# Altium PCB Board_V1_9.PcbDoc
Units mil, origin at the board's own origin, x right, y up, seen from the top; angles counter-clockwise.
Board outline 4000 x 2500 mil, 2 copper layers (Top Layer, Bottom Layer); 21 components, 20 nets, 97 pads, 6 vias.
Unrouted connection lines stored in the file: 13.
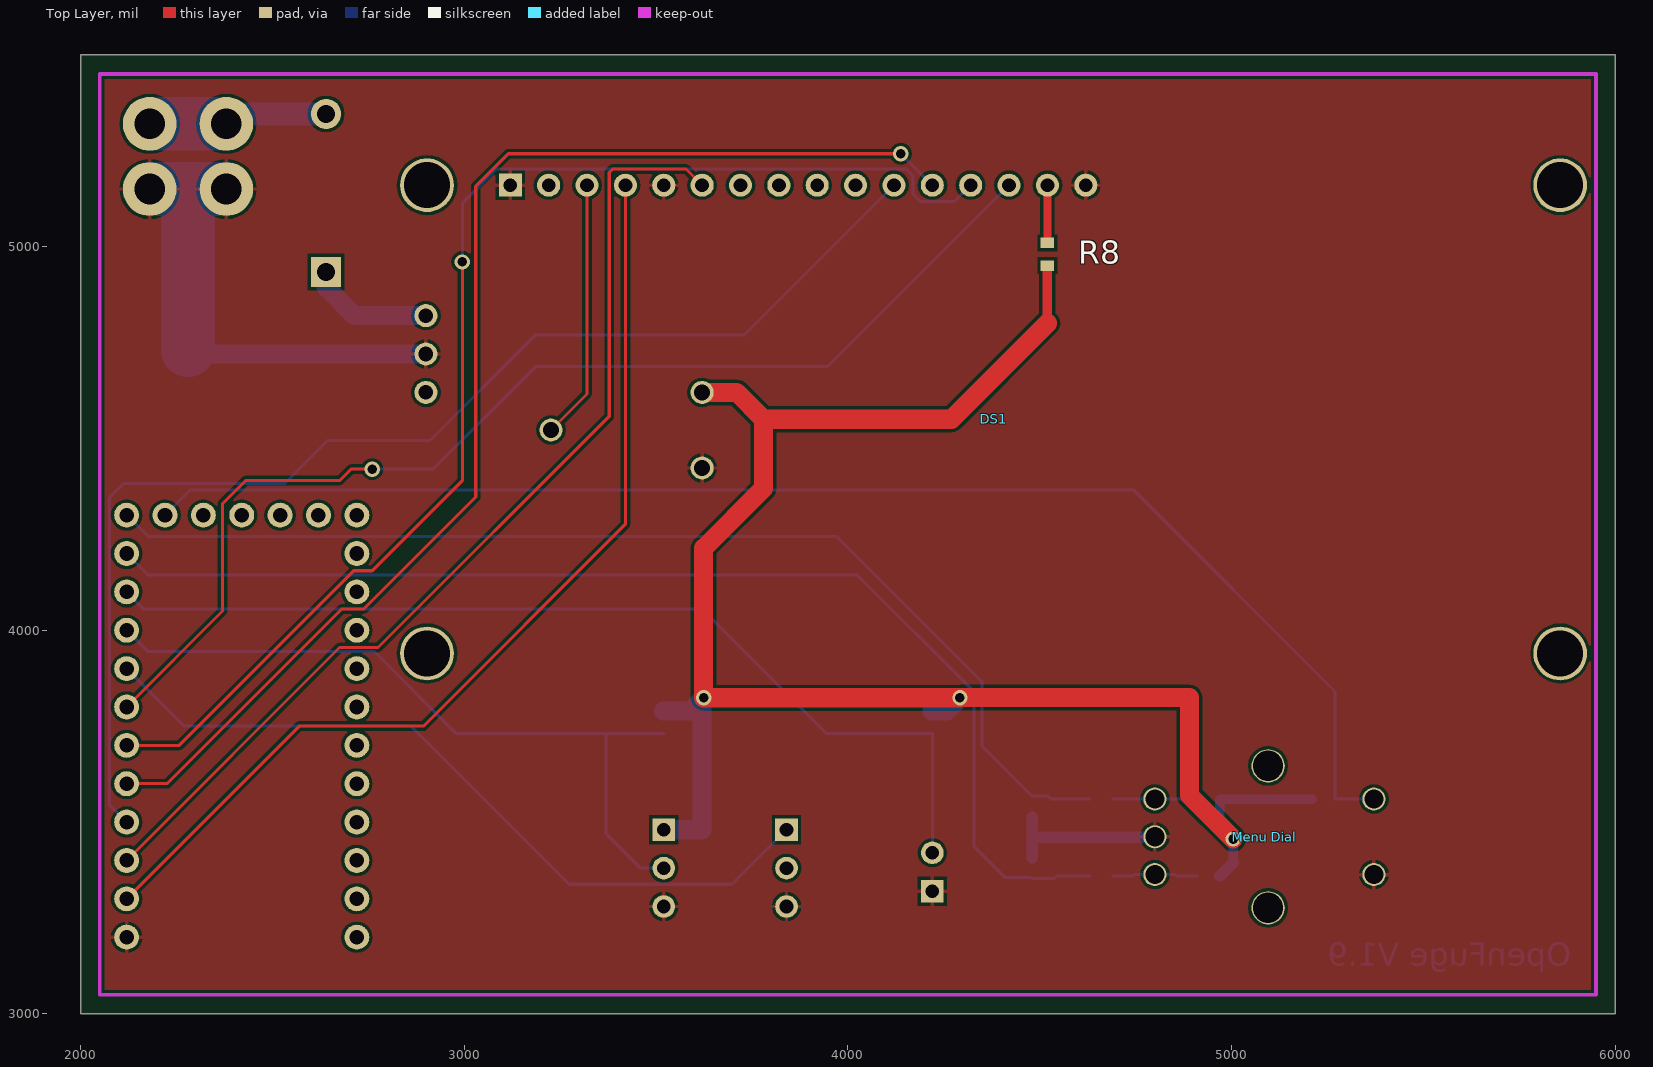
[diagram p0: Top Layer view]
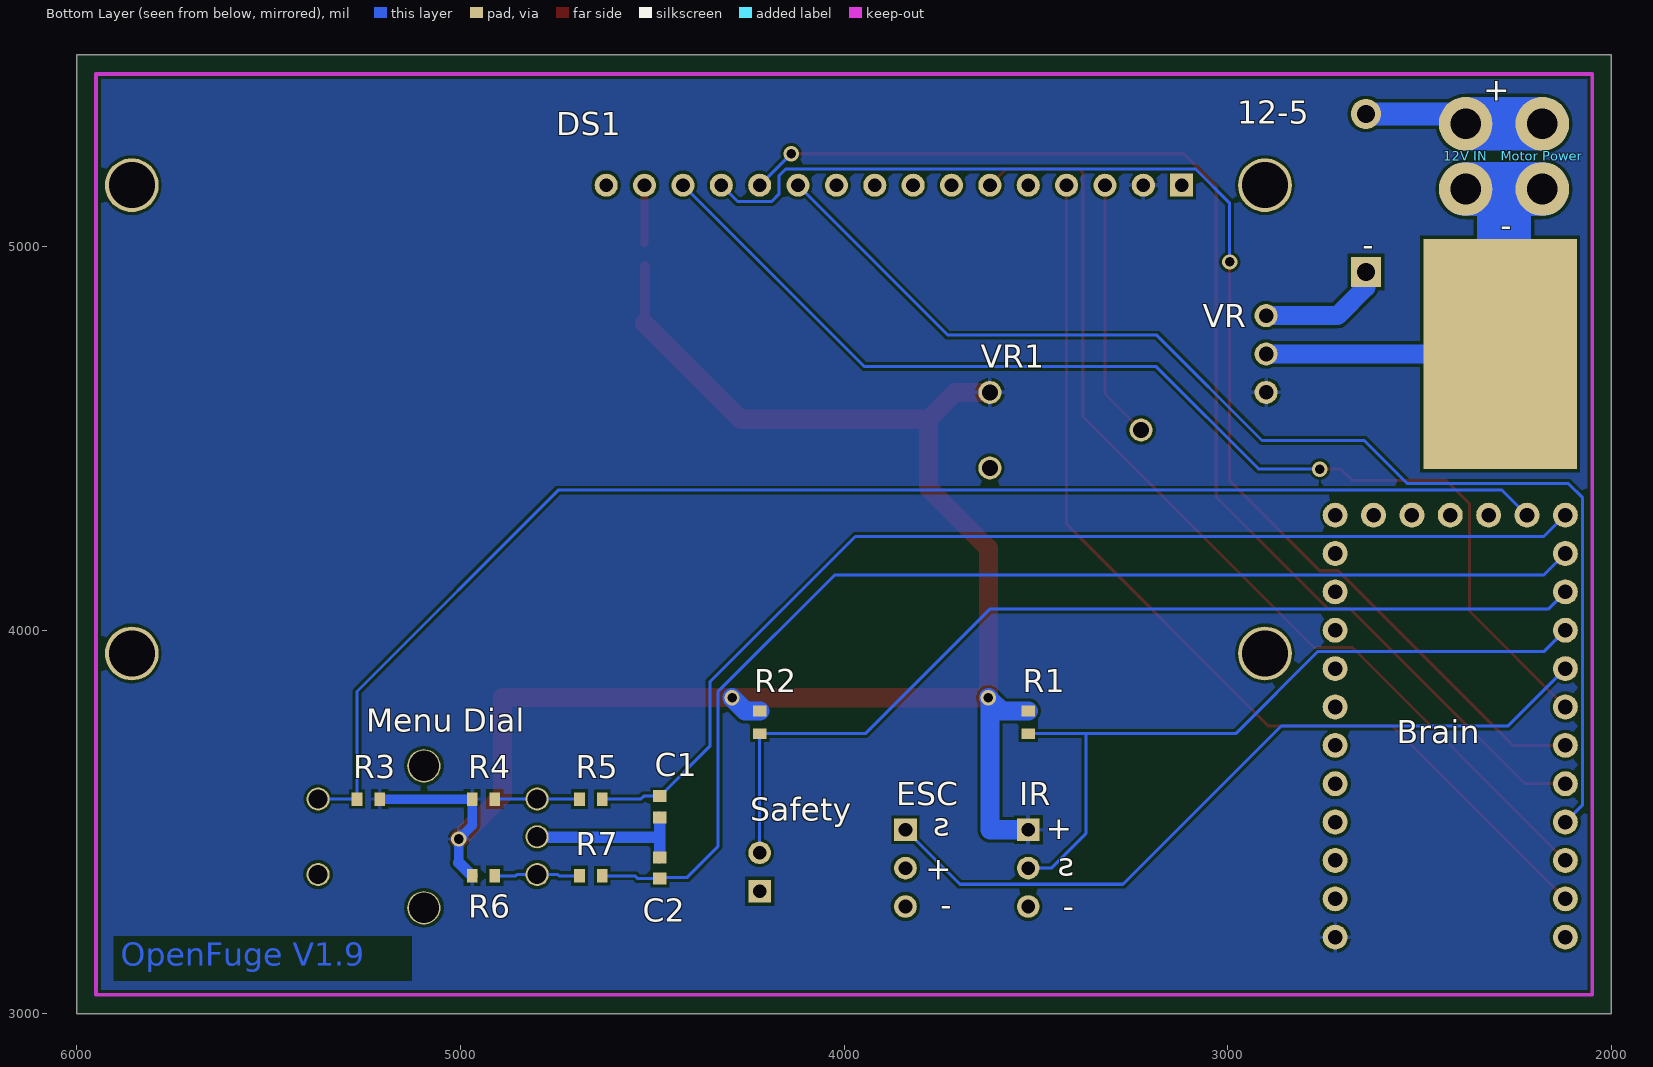
[diagram p1: Bottom Layer view, seen from below]

## Layer stack, top to bottom
Top Layer: signal copper 1.4
Dielectric: core 12.6, FR-4, Dk 4.8
Bottom Layer: signal copper 1.4

## Board outline
2000,3000 6000,3000 6000,5500 2000,5500

## Design rules (kind name [scope] priority, off if disabled: settings)
Clearance [All] p1: gap=8
HoleSize [All] p1: absolutevalues=TRUE maxlimit=130 minlimit=1 maxpercent=80.000 minpercent=20.000
PolygonConnect [All] p1: connectstyle=Relief reliefconductorwidth=10 reliefentries=4 polygonreliefangle="90 Angle"
RoomDefinition Board [InComponentClass('Board')] p1: confinementstyle=ConfineIn formatcopy=TRUE lockcomponents=FALSE outline 2065,3145 5950,3145 5950,5410 2065,5410
RoutingVias [All] p1: holewidth=25 width=40 viastyle="Through Hole" minholewidth=28 minwidth=50 maxholewidth=28 maxwidth=50
SilkscreenOverComponentPads [All] p1: minsilkscreentomaskgap=10
SolderMaskExpansion [All] p1: expansion=10
Width "Width PWR" [InNetClass('PWR')] p1: maxlimit=140 minlimit=25 preferedwidth=50
Width [All] p2: maxlimit=25 minlimit=8 preferedwidth=10 minimp=50.000000 maximp=50.000000 favimp=50.000000
26 further rules are at their usual default settings.

## Classes and differential pairs
net class PWR: 11V 12V GND VCC

## Components (designator, comment, footprint, x,y, rotation, side; value= is the part's Value field where it differs from the comment)
12-5 "Diode 1N4001" DIO10.46-5.3x2.8 2640,5140 r270 bottom
"12V IN" "Large_Wire" Large_Wire_Mount 2380,5320 r270 bottom
Brain "Teensy 2.0" "Teensy 2.0" 2120,3200 r0 bottom
C1 "Cap Semi" CAPC1608L 4480,3540 r270 bottom
C2 "Cap Semi" CAPC1608L 4480,3380 r90 bottom
DS1 "16x2 lcd" "16x2 lcd" 3120,5160 r0 top
ESC "Header 3" HDR1X3#1 3840,3480 r270 bottom
IR "Header 3" HDR1X3#2 3520,3480 r270 bottom
"Menu Dial" "Rotary Switch" "Rotary Switch" 4800,3560 r270 top
"Motor Power" "Large_Wire" Large_Wire_Mount 2180,5320 r270 bottom
R1 "Res3" RESC1608L#1 3520,3760 r270 bottom
R2 "Res3" RESC1608L#1 4220,3760 r270 bottom
R3 "Res3" RESC1608L#1 5240,3560 r0 bottom
R4 "Res3" RESC1608L#1 4940,3560 r180 bottom
R5 "Res3" RESC1608L#1 4660,3560 r0 bottom
R6 "Res3" RESC1608L#1 4940,3360 r0 bottom
R7 "Res3" RESC1608L#1 4660,3360 r0 bottom
R8 "Res3" RESC1608L#2 4520,4980 r270 top
Safety "Header 2" HDR1X2 4220,3320 r90 bottom
VR "VR LM2940" "VR LM2940" 2900,4820 r270 bottom
VR1 "3319 9mm Trimpot" "3319 9mm Trimpot" 3620,4620 r270 bottom

## Footprints (in the part's own frame and the unit in brackets; to place one, negate y for a bottom-side part, rotate by r counter-clockwise, add the part's x,y. Pads: shape width x height; smd on the part's side, far side on the other; paste and mask are expansions set on the pad)
"16x2 lcd" [mil]
  rect 60x60 hole 36: 1(0,0)
  round 60 hole 36: 2(100,0) 3(200,0) 4(300,0) 5(400,0) 6(500,0) 7(600,0) 8(700,0) 9(800,0) 10(900,0) 11(1000,0) 12(1100,0) 13(1200,0) 14(1300,0) 15(1400,0) 16(1500,0)
  round 140 hole 120: 17(-217,0) 18(-217,-1220.5) 19(2736.5,-1220.5) 20(2736.5,0)
"3319 9mm Trimpot" [mil]
  round 60 hole 42: 1(0,0) 2(197,0) 3(98,394)
CAPC1608L [mm] "Chip Capacitor, Body 1.6x0.8mm, IPC High Density"
  rect 0.8x0.9 smd mask+0.381: 1(-0.7,0) 2(0.7,0)
  body extent -0.87,-0.48 0.87,0.48, height 1.3
DIO10.46-5.3x2.8 [mm] "Diode, Axial; Body 5.2 x 2.7 mm (LxDia. max), Lead Dia. 0.86 mm (max)"
  round 2 hole 1.2: 1(-5.23,0)
  rect 2x2 hole 1.2: 2(5.23,0)
HDR1X2 [mm] "Connector; Header; 2 Position"
  rect 1.5x1.5 hole 0.9 mask+0.254: 1(0,0)
  round 1.5 hole 0.9 mask+0.254: 2(2.54,0)
HDR1X3#1 [mm] "Connector; Header; 3 Position"
  rect 1.5x1.5 hole 0.9 mask+0.254: 1(0,0)
  round 1.5 hole 0.9 mask+0.254: 2(2.54,0) 3(5.08,0)
HDR1X3#2 [mm] "Connector; Header; 3 Position"
  rect 1.5x1.5 hole 0.9 mask+0.127: 1(0,0)
  round 1.5 hole 0.9 mask+0.127: 2(2.54,0) 3(5.08,0)
Large_Wire_Mount [mil]
  round 140 hole 80: 0(0,0) 1(170,0)
RESC1608L#1 [mm] "Chip Resistor, Body 1.6x0.8mm, IPC High Density"
  rect 0.7x0.9 smd: 1(-0.75,0) 2(0.75,0)
  body extent -0.85,-0.48 0.85,0.48, height 0.9
RESC1608L#2 [mm] "Chip Resistor, Body 1.6x0.8mm, IPC High Density"
  rect 0.7x0.9 smd mask+0.254: 1(-0.75,0) 2(0.75,0)
  body extent -0.85,-0.48 0.85,0.48, height 0.9
"Rotary Switch" [mm]
  round 1.524 hole 1.27: 1(2.5,0) 2(5,14.5) 3(0,14.5) 4(0,0) 5(5,0)
  round 2.2 hole 2: 6(7.2,7.5) 7(-2.2,7.5)
"Teensy 2.0" [mil]
  round 65 hole 38: 1(0,0) 2(0,-100) 3(0,-200) 4(0,-300) 5(0,-400) 6(0,-500) 7(0,-600) 8(0,-700) 9(0,-800) 10(0,-900) 11(0,-1000) 12(0,-1100) 13(100,-1100) 14(200,-1100) 15(300,-1100) 16(400,-1100) 17(500,-1100) 18(600,-1100) 19(600,-1000) 20(600,-900) 21(600,-800) 22(600,-700) 23(600,-600) 24(600,-500) 25(600,-400) 26(600,-300) 27(600,-200) 28(600,-100) 29(600,0)
"VR LM2940" [mil]
  round 60 hole 38: 1(0,0) 2(100,0) 3(200,0)
  rect 600x400 smd: 2(100,610)

## Part data
12-5: "1 Amp General Purpose Rectifier"
C1 C2: "Capacitor (Semiconductor SIM Model)"
ESC IR: "Header, 3-Pin"
R1 R2 R3 R4 R5 R6 R7 R8: "Resistor"
Safety: "Header, 2-Pin"

## Via types
v1: diameter 40, hole 25, Top Layer to Bottom Layer, 6 vias

## Nets (pads, with @x,y where several pads share a name; then routed paths per layer and width w, separated by ;. In a path a pad name is that pad's centre, name@x,y a point inside that pad or via, vN(x,y) a via of type N, cw(c..) or ccw(c..) an arc to the next point about the centre after c; other vN are vias at no path point)
11V: 12-5.2 VR.1 | length 330.7
  Bottom Layer w50: 12-5.2 2640,4894.09 2714.09,4820 VR.1
12V: 12-5.1 "12V IN.0" "Motor Power.0" | length 490.7
  Bottom Layer w50: 2380,5320 2394.09,5305.91
  Bottom Layer w60: 2380,5320 2405.91,5345.91 12-5.1
  Bottom Layer w140: 2180,5320 2380,5320
GND: "12V IN.1" "Menu Dial.1" "Menu Dial.2" "Motor Power.1" Brain.1 C1.2 C2.2 DS1.1 DS1.5 DS1.16 ESC.3 IR.3 Safety.1 VR1.2 VR.2 | length 1653.3
  Bottom Layer w30: C2.2 4480,3460 ; C1.2 4480,3460 ; 4798.43,3460 4480,3460
  Bottom Layer w50: VR.2@2290,4720 VR.2@2900,4720
  Bottom Layer w140: 2180,5150 2280,5150 ; VR.2@2280,4730 2280,5150 ; 2380,5150 2280,5150
NetBrain_2: Brain.2 DS1.4 | length 2588.3
  Top Layer w8: Brain.2 2570,3750 2894,3750 3420,4276 DS1.4
NetBrain_3: Brain.3 DS1.6 | length 2635.9
  Top Layer w8: Brain.3 2675,3955 2775.25,3955 3378,4557.75 3378,5193 3387,5202 3578,5202 DS1.6
NetBrain_4: Brain.4 DS1.11 | length 3246.2
  Bottom Layer w8: Brain.4 2075,3545 2075,4345 2112,4382 2531.37,4382 2643.87,4494.5 2910.5,4494.5 3185,4769 3729,4769 DS1.11
NetBrain_5: Brain.5 DS1.12 | length 3288.6
  Top Layer w8: Brain.5 2225,3600 2680.5,4055.5 2738.43,4055.5 3030,4347.07 3030,4350 3030,5157 3115,5242 v1(4138,5242)
  Bottom Layer w8: v1(4138,5242) DS1.12
NetBrain_6: Brain.6 DS1.13 | length 3326
  Top Layer w8: Brain.6 2257.07,3700 2712.07,4155 2760,4155 2995,4390 v1(2995,4960)
  Bottom Layer w8: v1(2995,4960) 2995,5113 3084,5202 4152,5202 4170,5184 4170,5136 4188,5118 4278,5118 DS1.13
NetBrain_7: Brain.7 DS1.14 | length 3027.4
  Top Layer w8: Brain.7 2370,4050 2370,4330 2430,4390 2675,4390 2705,4420 v1(2760,4420)
  Bottom Layer w8: v1(2760,4420) 2919,4420 2919.5,4420.5 3186,4687 3947,4687 DS1.14
NetBrain_8: Brain.8 ESC.1 | length 2011.6
  Bottom Layer w8: Brain.8 2270,3750 2861,3750 3273,3338 3698,3338 ESC.1
NetBrain_9: Brain.9 IR.2 R1.2 | length 1959.4
  Bottom Layer w8: Brain.9 2175,3945 2765,3945 2979.53,3730.47 3370,3730.47 ; IR.2 3460,3380 3370,3470 3370,3730.47 ; R1.2 3370,3730.47
NetBrain_10: Brain.10 R2.2 Safety.2 | length 2563.5
  Bottom Layer w8: Brain.10 2165,4055 3620,4055 3944.53,3730.47 R2.2 Safety.2
NetBrain_11: Brain.11 C2.1 R7.1 | length 3100.9
  Bottom Layer w8: Brain.11 2175.5,4144.5 2701.57,4144.5 4023.81,4144.5 4328.99,3839.33 4328.99,3436.01 4410,3355 4477.44,3355 C2.1 4537.44,3352.44 4545,3360 R7.1
NetBrain_12: Brain.12 C1.1 R5.1 | length 2913.9
  Bottom Layer w8: Brain.12@2121.15,4300 2176.65,4244.5 3970.5,4244.5 4350,3865 4350,3697.56 C1.1 4522.44,3567.56 4530,3560 R5.1
NetBrain_13: "Menu Dial.3" Brain.13 R3.2 | length 3675.5
  Bottom Layer w8: Brain.13 2285,4365 2739.75,4365 4745,4365 5269.53,3840.47 R3.2 5370.87,3560
NetDS1_3: DS1.3 VR1.3 | length 676.9
  Top Layer w8: VR1.3 3320,4616 DS1.3
NetDS1_15: DS1.15 R8.1 | length 150.5
  Top Layer w20: R8.1 DS1.15
"NetMenu Dial_4": "Menu Dial.4" R4.2 R5.2 | length 220.9
  Bottom Layer w8: R5.2 4800,3560 R4.2
"NetMenu Dial_5": "Menu Dial.5" R6.1 R7.2 | length 223.6
  Bottom Layer w8: R7.2 4743,3360 4746.15,3363.15 4800,3363.15 4853,3363.15 4856.15,3360 R6.1
VCC: Brain.29 DS1.2 IR.1 R1.1 R2.1 R3.1 R4.1 R6.2 R8.2 VR1.1 VR.3 | length 4768.9
  Top Layer w25: 4520,4800 R8.2
  Top Layer w50: VR1.1 3710,4620 3780,4550 ; v1(4291.99,3824) v1(3623.99,3824) 3623.99,4213.99 3780,4370 3780,4550 ; v1@4292.99,3825 4890,3825 4890,3570.01 v1(5004,3456.01) ; 4520,4800 4270,4550 3780,4550
  Bottom Layer w25: 5004,3394.47 v1(5004,3456.01) 4969.53,3490.49 R4.1 R3.1
  Bottom Layer w30: R6.2 5004,3394.47
  Bottom Layer w50: IR.1 3620,3480 v1@3620,3820.01 ; R1.1 3589.51,3789.53 v1@3620,3820.01 ; v1(3623.99,3824) v1@3620,3820.01 ; R2.1 4257.51,3789.53 v1(4291.99,3824)
pads on no net: "Menu Dial.6" "Menu Dial.7" Brain.14 Brain.15 Brain.16 Brain.17 Brain.18 Brain.19 Brain.20 Brain.21 Brain.22 Brain.23 Brain.24 Brain.25 Brain.26 Brain.27 Brain.28 DS1.7 DS1.8 DS1.9 DS1.10 DS1.17 DS1.18 DS1.19 DS1.20 ESC.2

## Polygon pours and split planes (outlines as drawn)
VCC on Bottom Layer "Top Layer-No Net" (solid, remove dead copper, pour order 1000): 2050,5450 5950,5450 5950,3050 2050,3050 2050,5450
GND on Top Layer "Top Layer-No Net" (solid, remove dead copper, pour order 1001): 2050,5460 2060,5450 5950,5450 5950,3060 5940,3050 2050,3050 2050,5450

## Keep-outs
Keep-Out Layer:
  lines w10: 2050,3050 2050,5450 5950,5450 5950,3050 2050,3050

## Other copper
Bottom Layer:
  text "OpenFuge V1.9" at 5885,3125 h60

## Silkscreen, mask and mechanical layers (free items; w line width, h text height)
Bottom Overlay:
  text "+" at 2265,5380 h60
  text "-" at 2260,5025 h60
  text "-" at 2620,4975 h60
  text "s" at 3725,3465 h60
  text "+" at 3405,3455 h60
  text "s" at 3400,3360 h60
  text "+" at 3720,3350 h60
  text "-" at 3720,3255 h60
  text "-" at 3400,3250 h60
Drill Drawing:
  text ".LEGEND" at 6200,3200 h60
  text "Drill Drawing." at 6200,3100 h60

## Dimensions
2050,3050 to 2050,5450 on Mechanical 1
2050,3050 to 5950,3050 on Mechanical 1